# Altium PCB distance_sensor_v2.PcbDoc
Units mm, origin at the board's own origin, x right, y up, seen from the top; angles counter-clockwise.
Board outline 65 x 58 mm, 4 copper layers (Top Layer, Int1, Int2, Bottom Layer), stack 1.568 mm thick; 68 components, 29 nets, 217 pads, 157 vias.
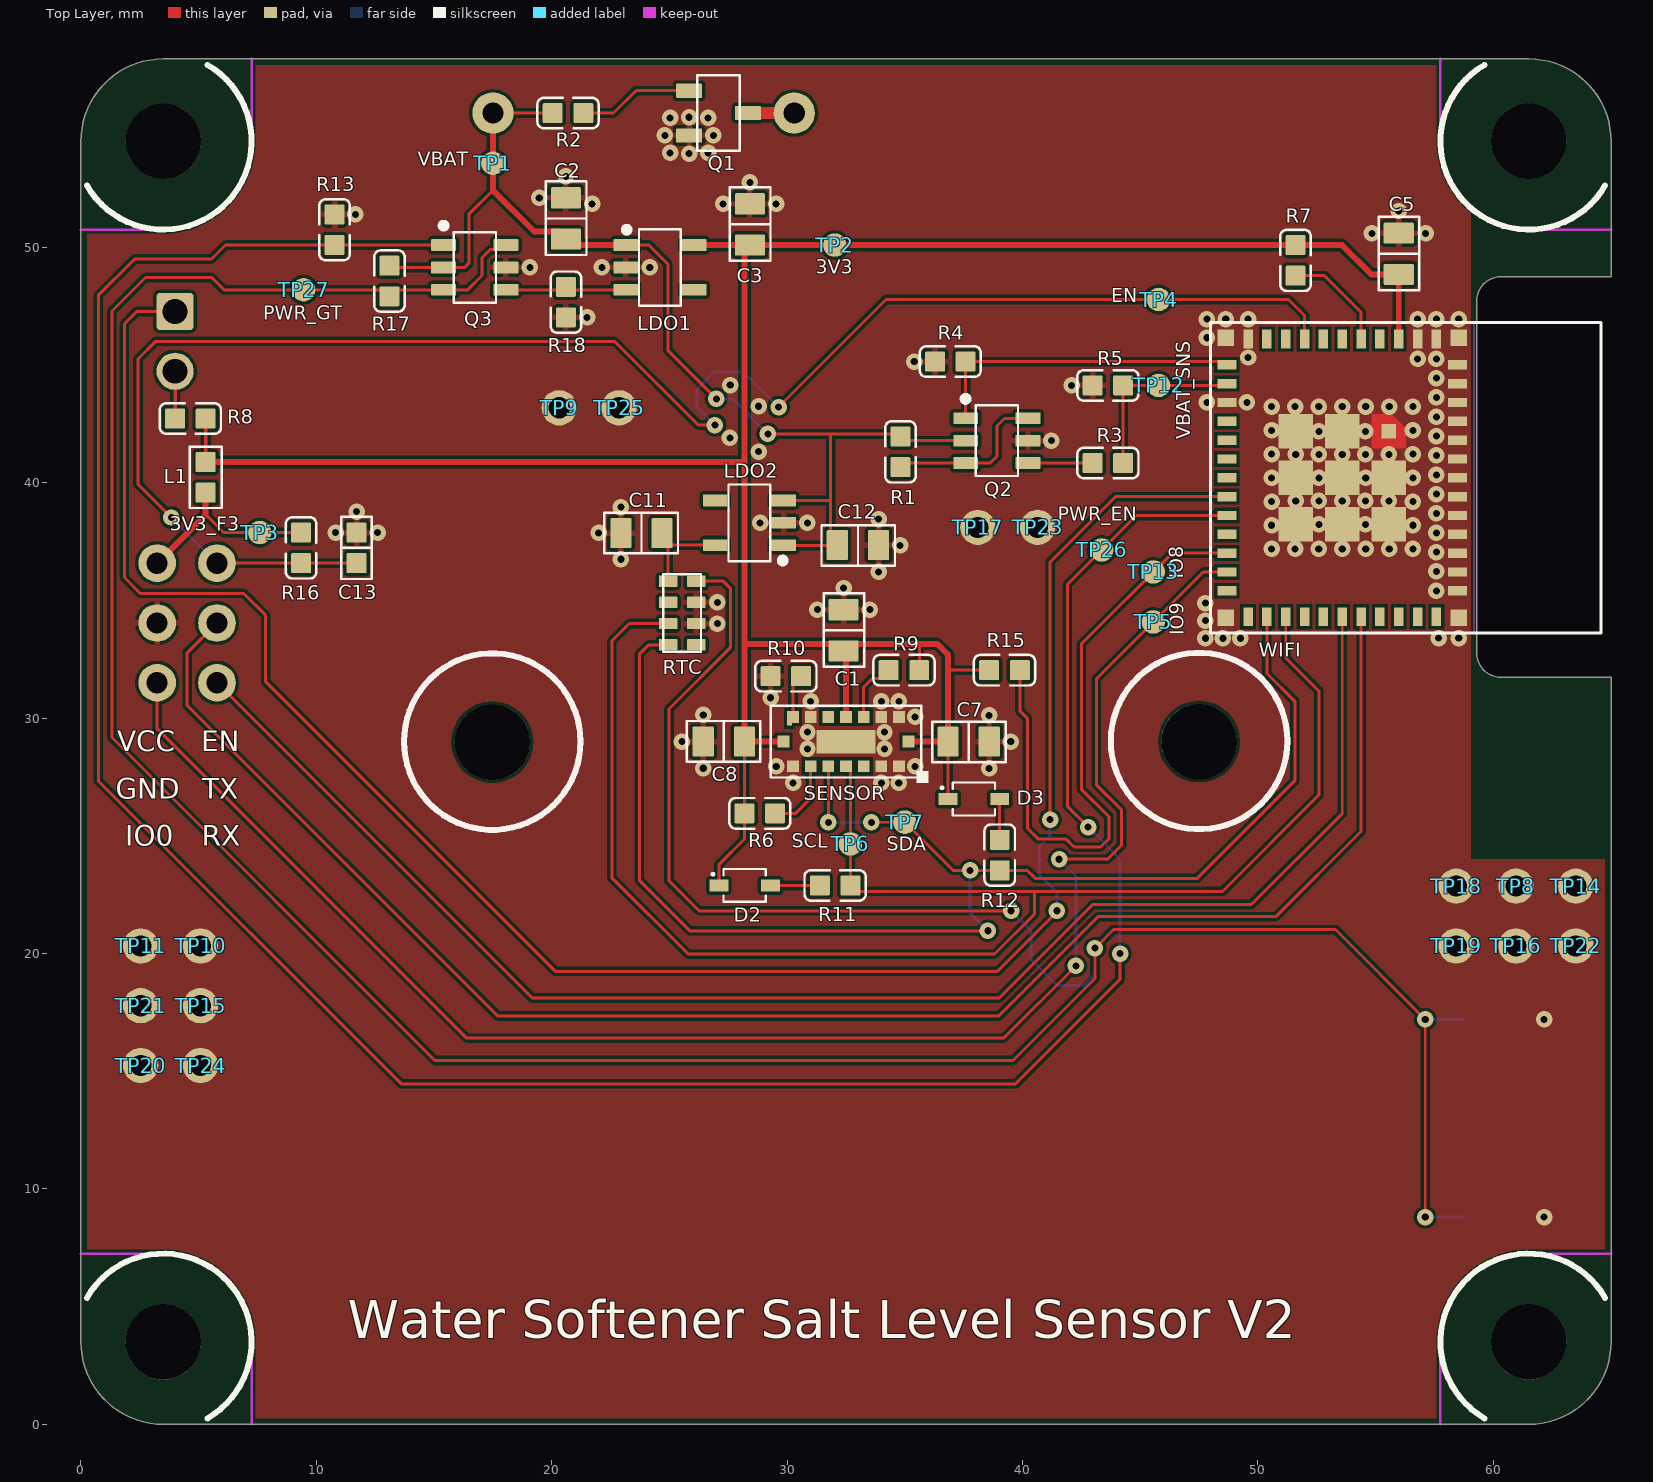
[diagram p0: Top Layer view]
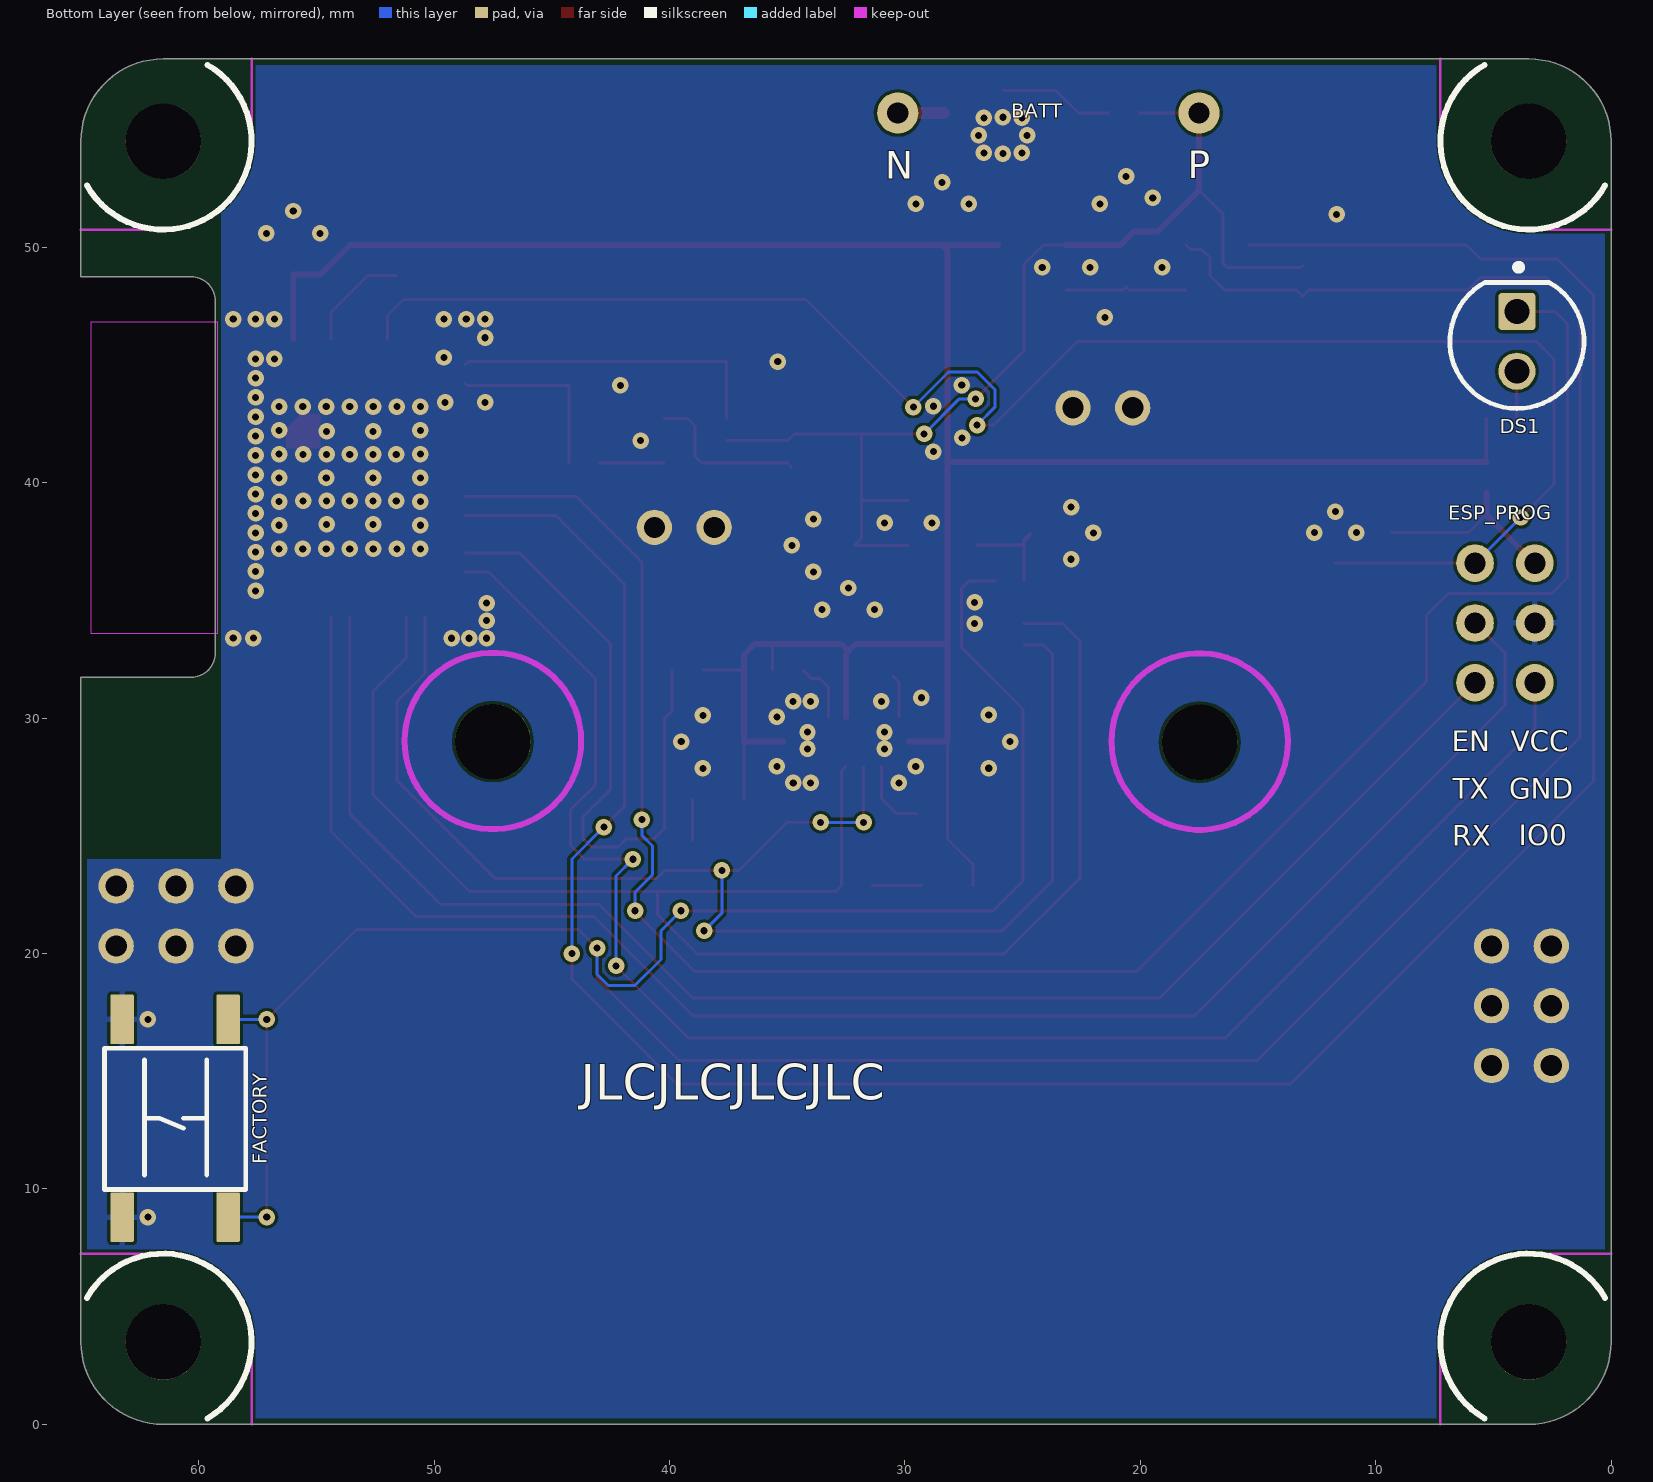
[diagram p1: Bottom Layer view, seen from below]
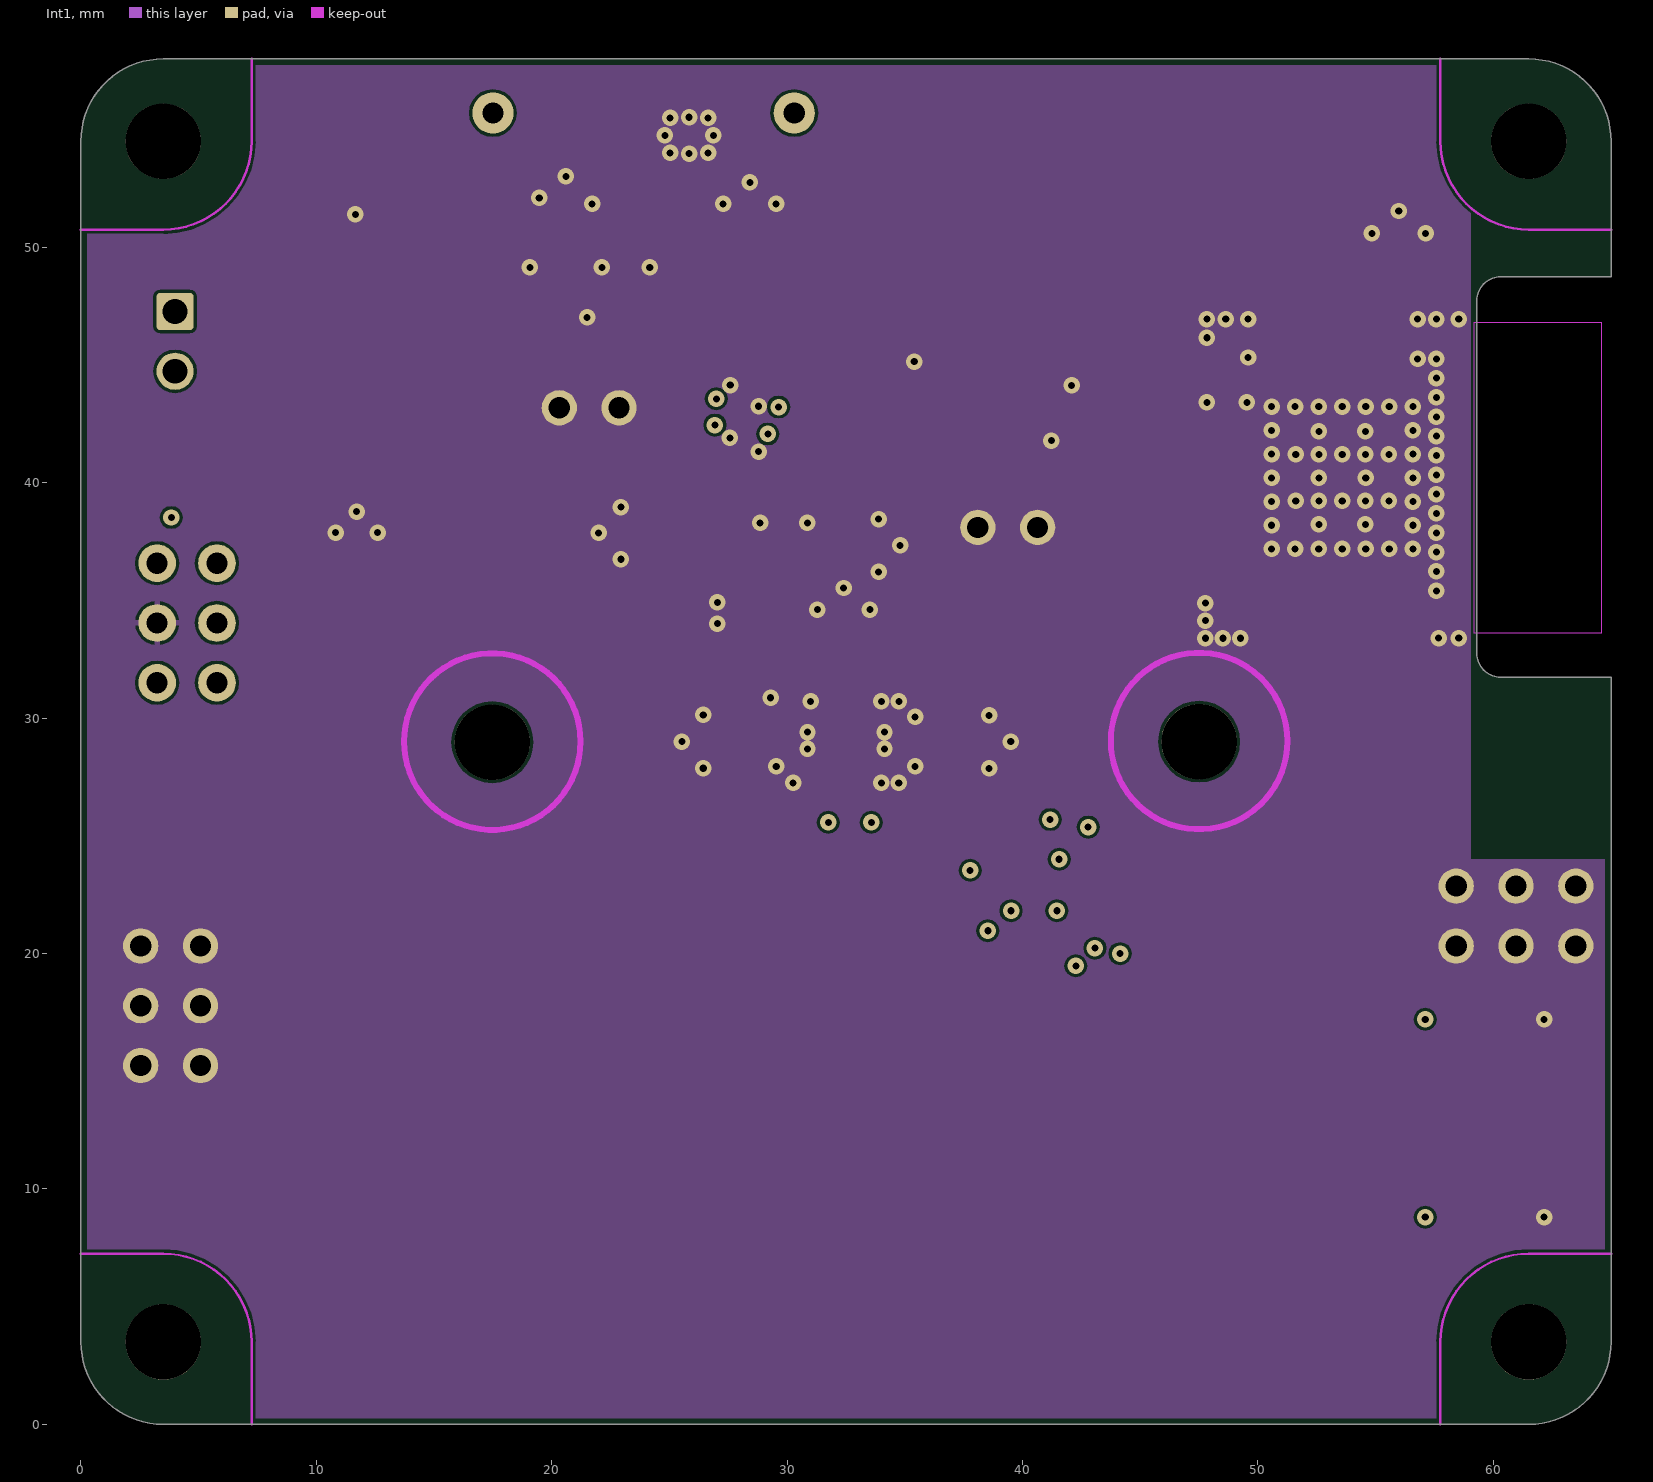
[diagram p2: Int1]
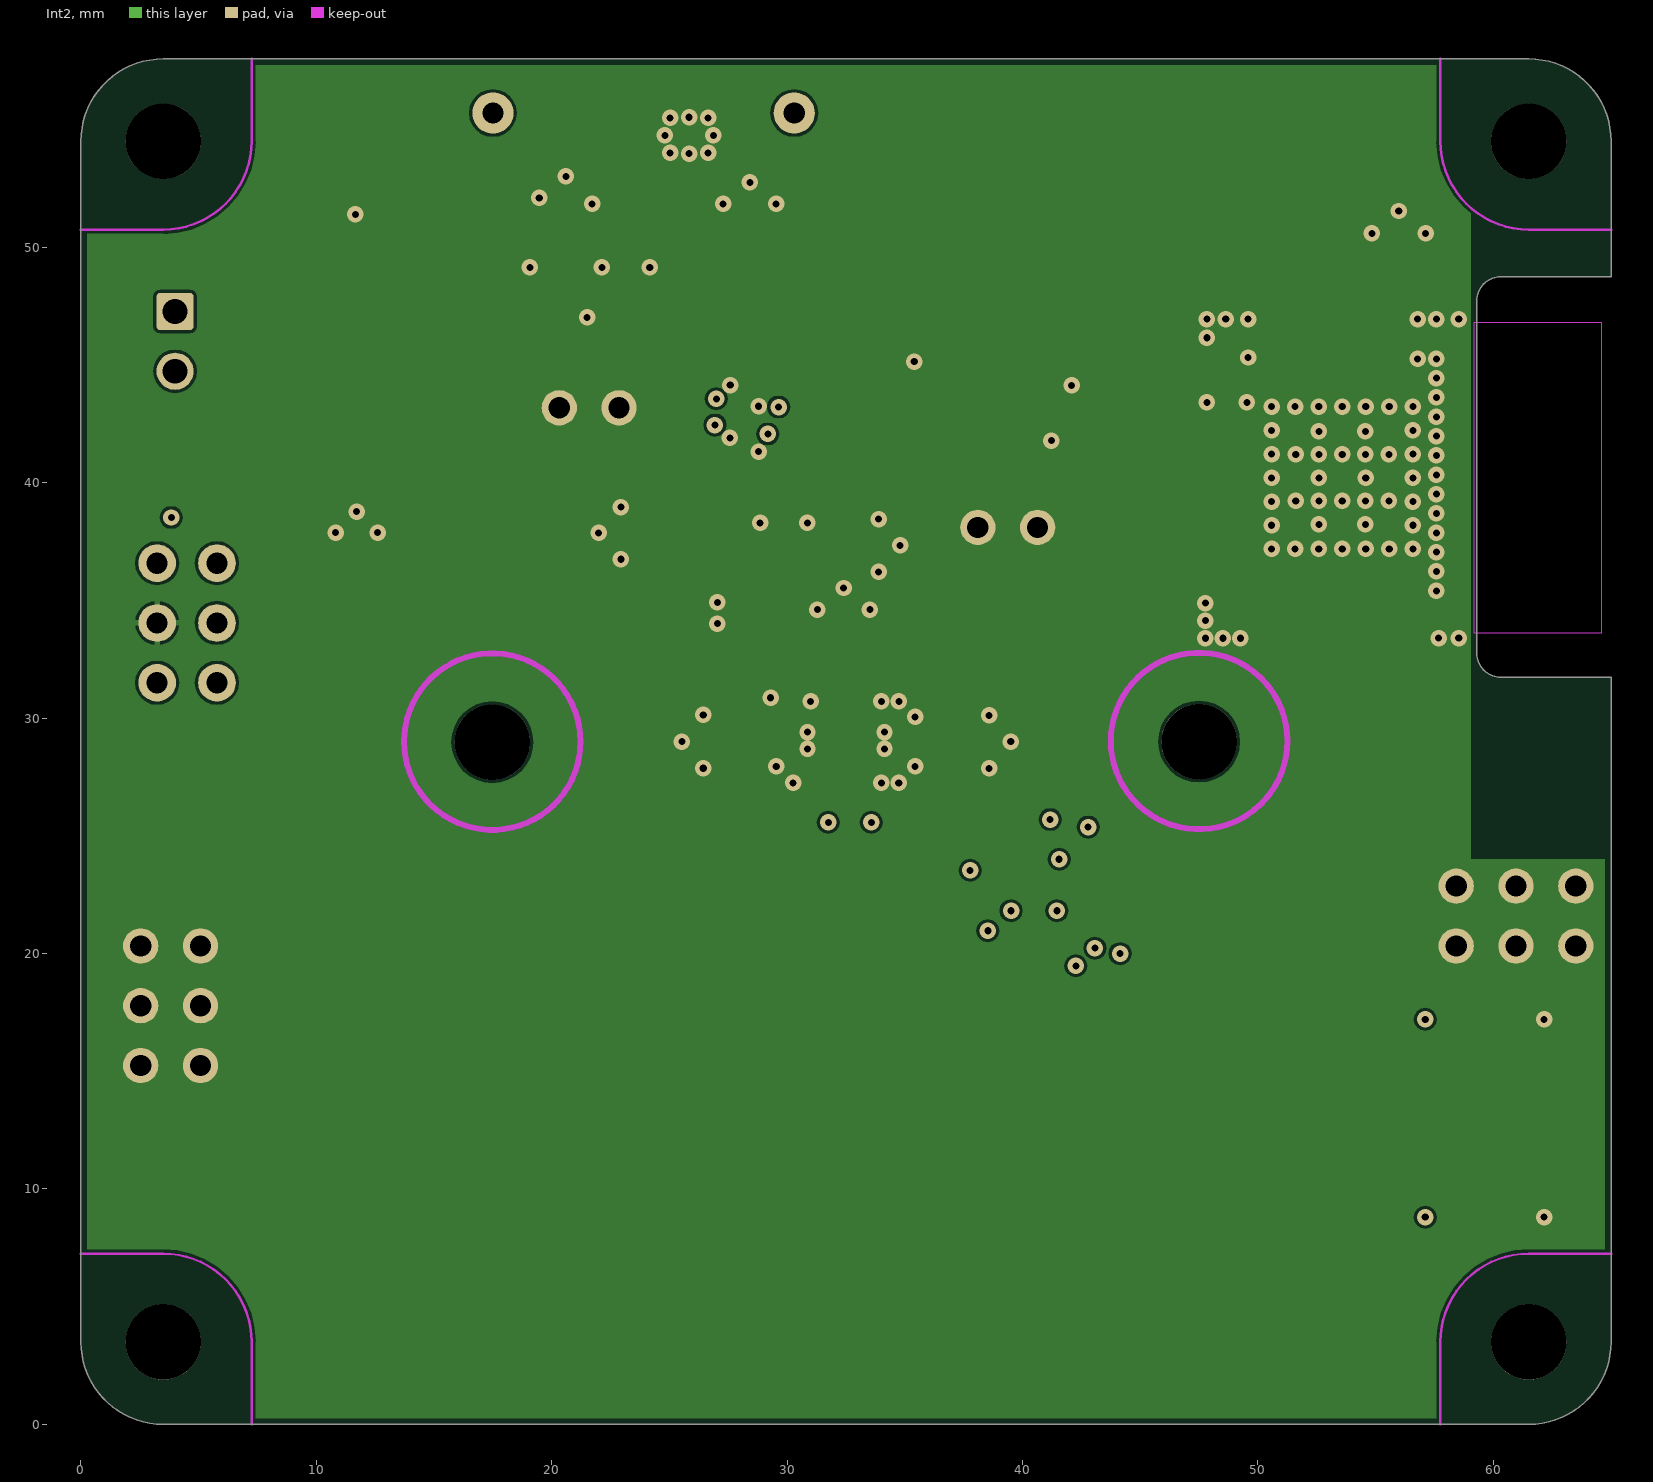
[diagram p3: Int2]
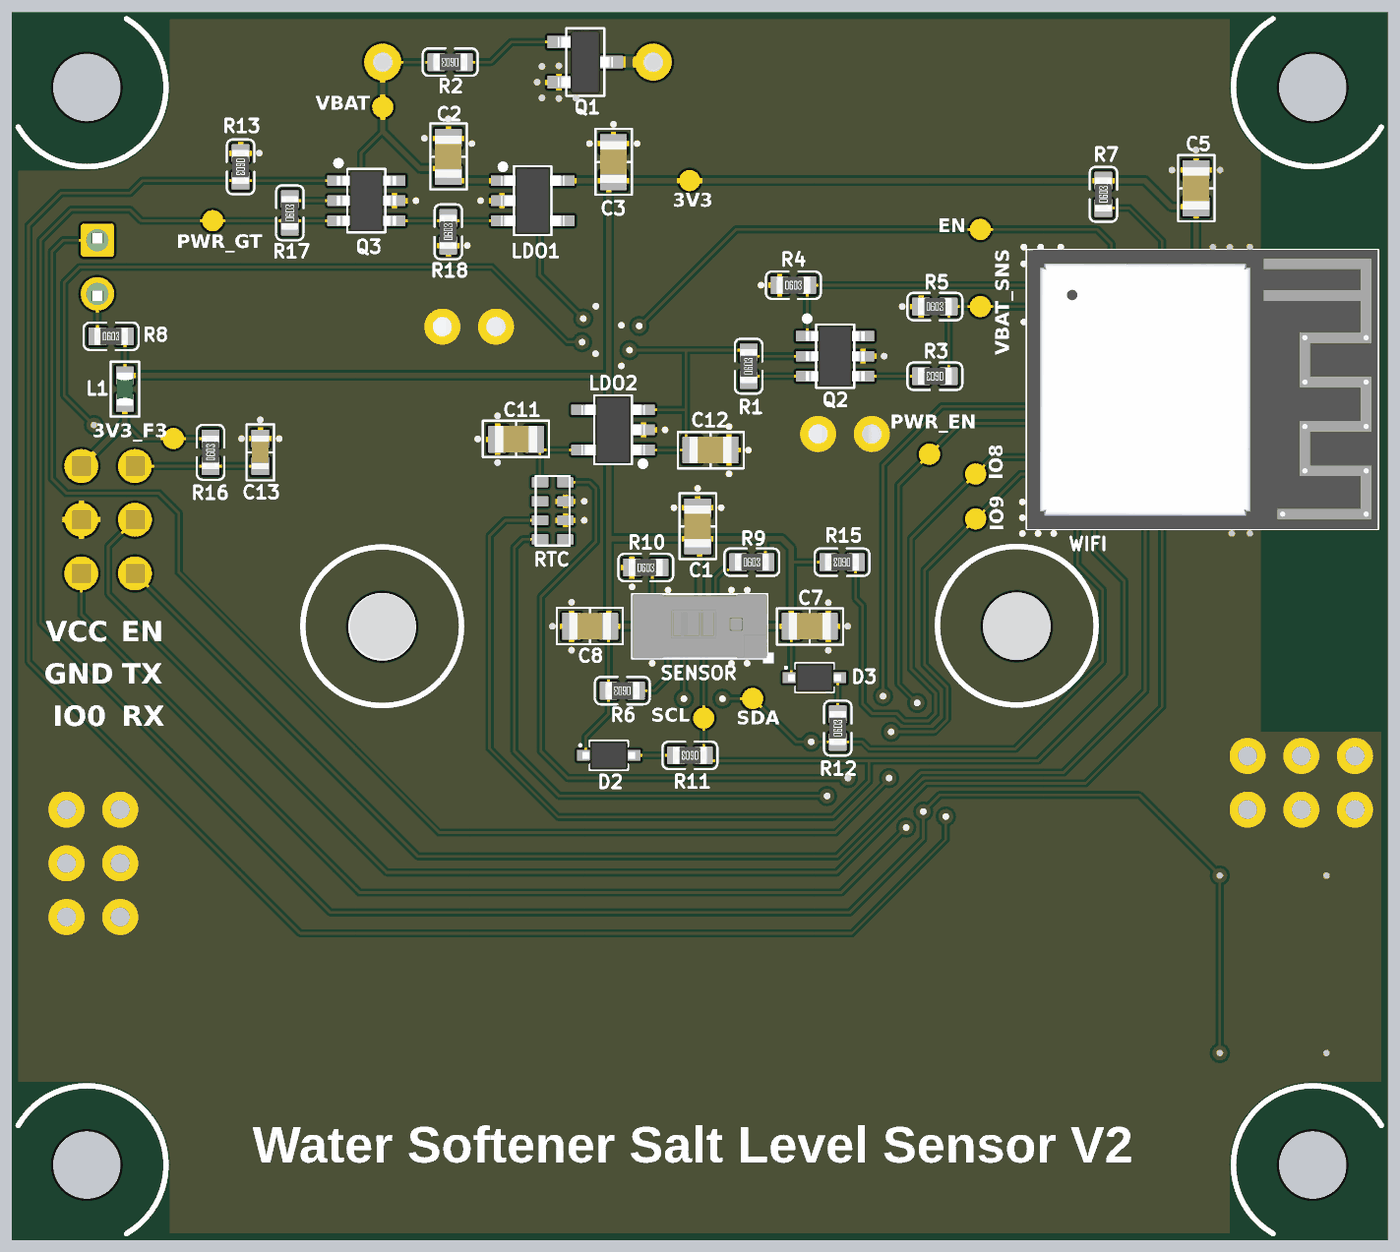
[diagram p4: 3D render of the assembled board from above, using the file's embedded part models]
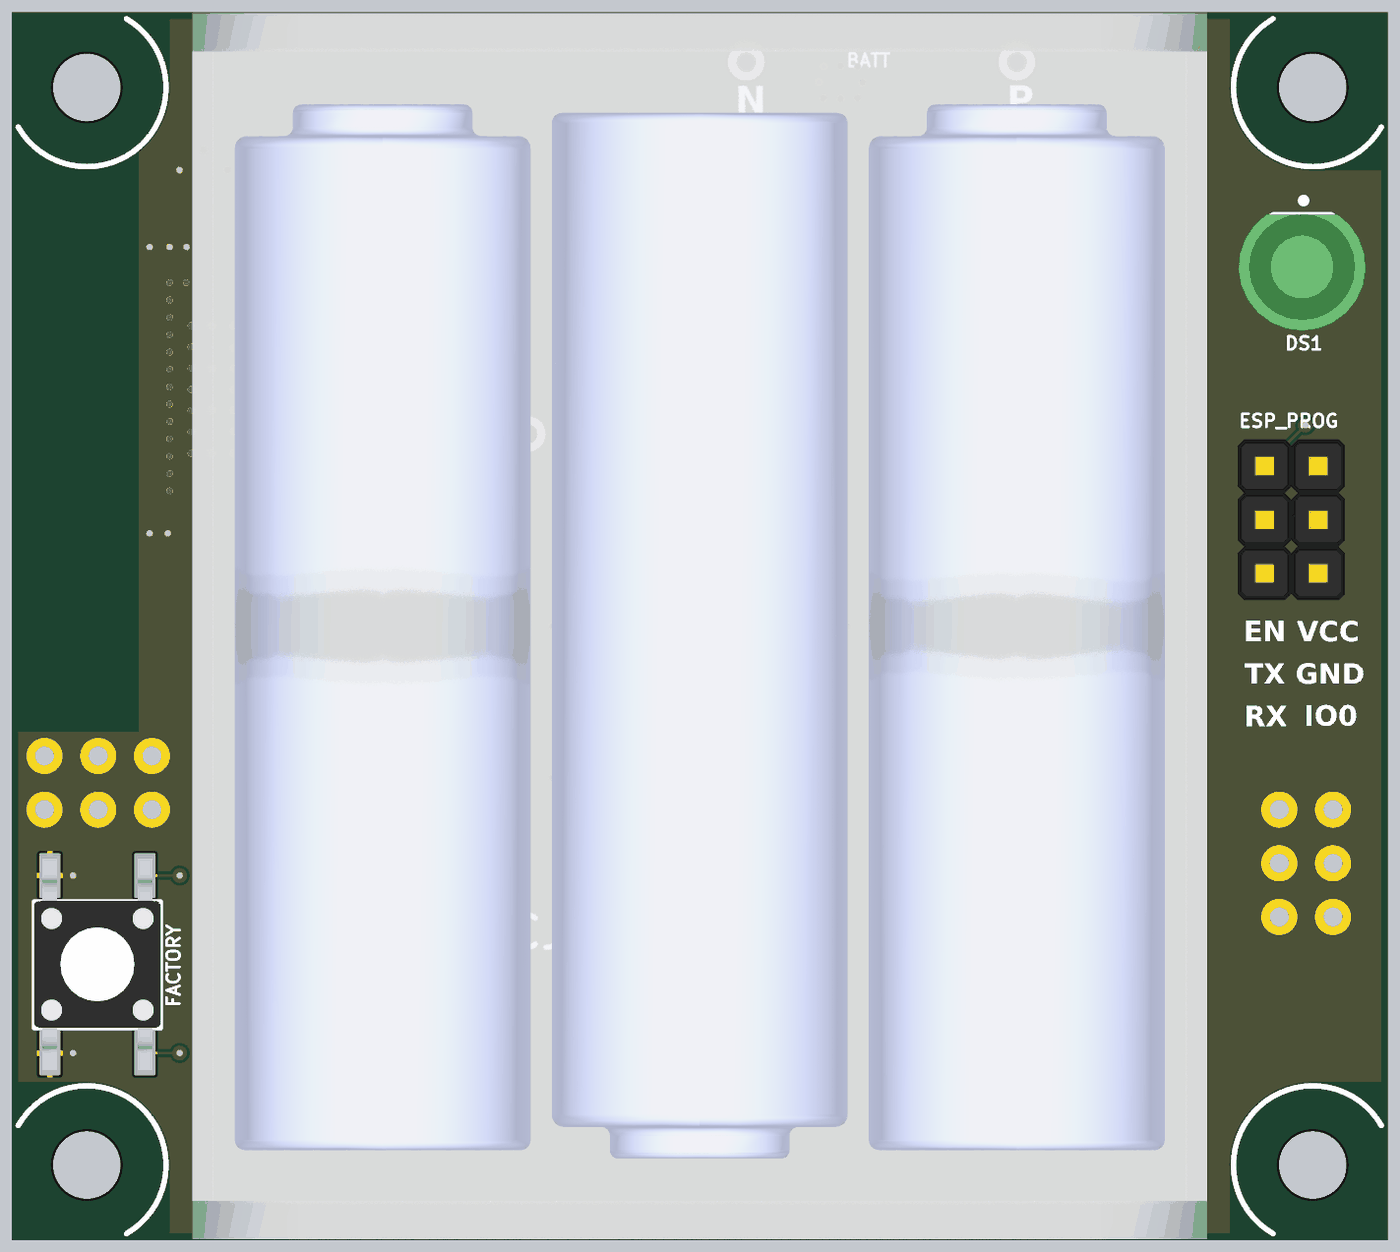
[diagram p5: 3D render of the assembled board from below, using the file's embedded part models]

## Layer stack, top to bottom
Top Solder: solder mask 0.0254, SM-001, Dk 4
Top Layer: signal copper 0.035
Dielectric 1: prepreg 0.2014, PP-017, Dk 4.3
Int1: signal copper 0.0152
Dielectric 2: core 1.065, Core-039, Dk 4.8
Int2: signal copper 0.0152
Dielectric 3: prepreg 0.2014, PP-017, Dk 4.3
Bottom Layer: signal copper 0.035
Bottom Solder: solder mask 0.0254, SM-001, Dk 4

## Board outline
0,3.5 0,54.5 cw(c3.5,54.5) 3.5,58 61.5,58 cw(c61.5,54.5) 65,54.5 65,48.74 60.3,48.74 ccw(c60.3,47.74) 59.3,47.74 59.3,32.74 ccw(c60.3,32.74) 60.3,31.74 65,31.74 65,3.5 cw(c61.5,3.5) 61.5,0 3.5,0 cw(c3.5,3.5)

## Design rules (kind name [scope] priority, off if disabled: settings)
BoardOutlineClearance [OnSignal] p1: gap=0.254 ignorepadtopadclearanceinfootprint=FALSE
Clearance [All] p1: gap=0.127 ignorepadtopadclearanceinfootprint=FALSE
ComponentClearance [All] p1: gap=0.015 collisioncheckmode=3 verticalgap=0.254 showdistances=FALSE
HoleSize [All] p1: absolutevalues=TRUE maxlimit=5 minlimit=0.3 maxpercent=80.000 minpercent=20.000
MinimumSolderMaskSliver [All] p1: minsoldermaskwidth=0.08
PolygonConnect PolygonConnect_GND [InNet('GND') vs HasFootprint('XCVR_ESP32-C3-MINI-1-N4') Or HasFootprint('VL53L5CXV0GC1') Or HasFootprint('TESTPAD')] p1: connectstyle=Direct reliefconductorwidth=0.254 reliefentries=4 polygonreliefangle="90 Angle" airgapwidth=0.254
PolygonConnect PolygonConnect_1 [All] p2: connectstyle=Relief reliefconductorwidth=0.254 reliefentries=4 polygonreliefangle="90 Angle" airgapwidth=0.127
RoutingVias [All] p1: holewidth=0.711 width=1.27 viastyle="Through Hole" minholewidth=0.711 minwidth=1.27 maxholewidth=0.711 maxwidth=1.27 useviatemplates=TRUE viatemplateguid#1={351D8F7E-A5F5-45D3-BCD8-DFDD5CF2F594} viatemplateguid#2={00A6F5BF-6FEC-49D2-999D-52EFA8FE0DC0} viatemplatename#1=GND_VIA viatemplatename#2=ROUTING_VIA
SilkToSilkClearance [All] p1: silktosilkclearance=0
SilkToSolderMaskClearance [False] p1: minsilkscreentomaskgap=0.254 clearancetoexposedcopper=TRUE
SolderMaskExpansion [All] p1: expansion=0.102 istentingtop=FALSE
Width [All] p1: maxlimit=1.27 minlimit=0.127 preferedwidth=0.127 midlayer1_maxwidth=0.254 midlayer2_maxwidth=0.254 minimp=50.000000 maximp=50.000000 favimp=50.000000
25 further rules are at their usual default settings.

## Components (designator, comment, footprint, x,y, rotation, side; value= is the part's Value field where it differs from the comment)
BATT "BATTERY" PP002055 32.5,29 r90 bottom
C1 "100nF" "CAP 0805_2012" 32.398,33.725 r270 top
C2 "4.7uF" "CAP 0805_2012" 20.602,51.223 r270 top
C3 "4.7uF" "CAP 0805_2012" 28.416,50.969 r270 top
C5 "4.7uF" "CAP 0805_2012" 55.98,49.723 r270 top
C7 "2.2uF" "CAP 0805_2012" 37.707,29 r180 top
C8 "2.2uF" "CAP 0805_2012" 27.312,29 r0 top
C11 "2.2uF" "CAP 0805_2012" 23.812,37.853 r0 top
C12 "2.2uF" "CAP 0805_2012" 33.008,37.345 r180 top
C13 "1uF" "CAP 0603_1608" 11.709,37.23 r270 top
D2 "BAT20JFILM" SODFL250X100-2L 28.198,22.89 r0 top
D3 "BAT20JFILM" SODFL250X100-2L 37.931,26.563 r0 top
DS1 "4mA" "LED 5MM THROUGH HOLE" 4,46 r0 bottom
ESP_PROG "ESP_PROG" IDC3X2 4.508,34.04 r270 bottom
FACTORY "4-1437565-1" FSM-SWITCH 61,13 r180 bottom
L1 "1.6nH" INDUCTOR_0603 5.3,40.223 r270 top
LDO1 "SPX3819M5-L-3-3" SOT23-5 24.597,49.142 r0 top
LDO2 "AP2139AK3.3" SOT23-5 28.399,38.295 r180 top
Q1 "MOSFET-N" SOT95P230X110-3L 27.086,55.7 r270 top
Q2 "MOSFET-NP" DMG6601LVT 38.906,41.783 r0 top
Q3 "MOSFET-NP" DMG6601LVT 16.731,49.142 r0 top
R1 "47K" "RES 0603_1608" 34.812,41.308 r90 top
R2 "47K" "RES 0603_1608" 20.692,55.7 r180 top
R3 "10K" "RES 0603_1608" 43.624,40.833 r180 top
R4 "47K" "RES 0603_1608" 36.931,45.142 r0 top
R5 "10K" "RES 0603_1608" 43.624,44.13 r0 top
R6 "47K" "RES 0603_1608" 28.838,25.953 r180 top
R7 "47K" "RES 0603_1608" 51.599,49.442 r90 top
R8 "47K" "RES 0603_1608" 4.65,42.723 r0 top
R9 "47K" "RES 0603_1608" 34.962,32.033 r0 top
R10 "47K" "RES 0603_1608" 29.946,31.779 r0 top
R11 "2K2" "RES 0603_1608" 32.037,22.89 r180 top
R12 "2K2" "RES 0603_1608" 39.031,24.179 r90 top
R13 "47K" "RES 0603_1608" 10.775,50.742 r270 top
R15 "47K" "RES 0603_1608" 39.233,32.033 r180 top
R16 "47K" "RES 0603_1608" 9.354,37.23 r90 top
R17 "47K" "RES 0603_1608" 13.106,48.565 r90 top
R18 "47K" "RES 0603_1608" 20.602,47.669 r90 top
RTC "RV-8263-C7" RV-8263-C7 25.542,34.464 r90 top
SENSOR "VL53L5CXV0GC" VL53L5CXV0GC1 32.5,29 r180 top
TP1 "VBAT" TESTPOINT 17.5,53.569 r0 top
TP2 "3V3" TESTPOINT 32.022,50.092 r0 top
TP3 "3V3_F3" TESTPOINT 7.595,37.88 r180 top
TP4 "EN" TESTPOINT 45.776,47.78 r0 top
TP5 "IO9" TESTPOINT 45.556,34.082 r0 top
TP6 "SCL" TESTPOINT 32.687,24.653 r0 top
TP7 "SDA" TESTPOINT 35,25.58 r0 top
TP8 "TESTPOINT" TESTPAD 60.96,22.86 r270 top
TP9 "TESTPOINT" TESTPAD 20.32,43.18 r0 top
TP10 "TESTPOINT" TESTPAD 5.08,20.32 r180 top
TP11 "TESTPOINT" TESTPAD 2.54,20.32 r180 top
TP12 "VBAT_SNS" TESTPOINT 45.776,44.13 r0 top
TP13 "IO8" TESTPOINT 45.556,36.206 r0 top
TP14 "TESTPOINT" TESTPAD 63.5,22.86 r270 top
TP15 "TESTPOINT" TESTPAD 5.08,17.78 r270 top
TP16 "TESTPOINT" TESTPAD 60.96,20.32 r90 top
TP17 "TESTPOINT" TESTPAD 38.1,38.1 r0 top
TP18 "TESTPOINT" TESTPAD 58.42,22.86 r180 top
TP19 "TESTPOINT" TESTPAD 58.42,20.32 r180 top
TP20 "TESTPOINT" TESTPAD 2.54,15.24 r270 top
TP21 "TESTPOINT" TESTPAD 2.54,17.78 r270 top
TP22 "TESTPOINT" TESTPAD 63.5,20.32 r90 top
TP23 "TESTPOINT" TESTPAD 40.64,38.1 r0 top
TP24 "TESTPOINT" TESTPAD 5.08,15.24 r270 top
TP25 "TESTPOINT" TESTPAD 22.86,43.18 r0 top
TP26 "PWR_EN" TESTPOINT 43.368,37.141 r0 top
TP27 "PWR_GT" TESTPOINT 9.456,48.192 r0 top
WIFI "ESP32-C3-MINI-1-N4" XCVR_ESP32-C3-MINI-1-N4 56.28,40.206 r270 top

## Footprints (in the part's own frame and the unit in brackets; to place one, negate y for a bottom-side part, rotate by r counter-clockwise, add the part's x,y. Pads: shape width x height; smd on the part's side, far side on the other; paste and mask are expansions set on the pad)
"CAP 0603_1608" [mm] "Chip Capacitor, 2-Leads, Body 1.60x0.80mm, IPC Medium Density"
  rrect10% 0.848x0.848 smd: 1(-0.65,0) 2(0.65,0)
  silkscreen extent -1.33,-0.65 1.33,0.65, body extent -0.8,-0.41 0.8,0.41, height 0.82
"CAP 0805_2012" [mm] "Chip Capacitor, 2-Leads, Body 2.00x1.20mm, IPC Medium Density"
  rrect10% 0.9x1.275 smd: 1(-0.876,0) 2(0.876,0)
  silkscreen extent -1.58,-0.85 1.55,0.87, body extent -1,-0.64 1,0.64, height 1.26
DMG6601LVT [mm]
  rrect10% 1.05x0.5 smd: 1(-1.325,0.95) 2(-1.325,0) 3(-1.325,-0.95) 4(1.325,-0.95) 5(1.325,0) 6(1.325,0.95)
  silkscreen extent -1.45,-1.5 0.9,1.9, body extent -1.4,-1.45 1.4,1.45, height 1
FSM-SWITCH [mm]
  rrect10% 1x2.1 smd: 1(-2.25,-4.2) 1(-2.25,4.2) 2(2.25,-4.2) 2(2.25,4.2)
  silkscreen extent -3,-3.03 3,2.97, body extent -3,-5 3,5, height 5.07
IDC3X2 [mm]
  round 1.6 hole 0.9: 1(-2.54,-1.27) 2(0,-1.27) 3(2.54,-1.27) 4(2.54,1.27) 5(0,1.27) 6(-2.54,1.27)
  body extent -3.81,-2.54 3.81,2.54, height 8
INDUCTOR_0603 [mm]
  rrect10% 0.848x0.848 smd: 1(-0.65,0) 2(0.65,0)
  silkscreen extent -1.3,-0.67 1.3,0.67, body extent -0.8,-0.4 0.8,0.4, height 0.81
"LED 5MM THROUGH HOLE" [mm] "5MM through hole LED"
  round 1.58 hole 1.05: 1(0,1.27)
  rrect20% 1.58x1.58 hole 1.05: 2(0,-1.27)
  silkscreen extent -2.85,-3.22 2.85,2.85, body extent -3,-2.5 3,3, height 13.8
PP002055 [mm] "3 x AA Battery Holder"
  round 3.2 hole 3.2 unplated: M1(-0.025,-15.025) M2(0,15)
  round 1.75 hole 0.9: VNEG(26.7,-2.2) VPOS(26.7,-15)
  body extent -29,-24 29,24, height 17
"RES 0603_1608" [mm] "Chip Resistor, 2-Leads, Body 1.60x0.80mm, IPC Medium Density"
  rrect12% 0.848x0.848 smd: 1(-0.65,0) 2(0.65,0)
  silkscreen extent -1.3,-0.65 1.3,0.65, body extent -0.8,-0.4 0.8,0.4, height 0.45
RV-8263-C7 [mm] "Real-Time Clock Module"
  rrect10% 0.48x0.78 smd mask+0.076: 1(-1.35,-0.6) 2(-0.45,-0.6) 3(0.45,-0.6) 4(1.35,-0.6) 5(1.35,0.6) 6(0.45,0.6) 7(-0.45,0.6) 8(-1.35,0.6)
  silkscreen extent -1.65,-0.8 1.65,0.8, body extent -1.6,-0.75 1.6,0.75, height 0.8
SODFL250X100-2L [mm] "SODFL, 2-Leads, Body 1.25x2.50mm, IPC High Density"
  rrect1% 0.8x0.5 smd: 1(1.1,0) 2(-1.1,0)
  silkscreen extent -1.4,-0.7 0.9,0.7, body extent -1.25,-0.67 1.25,0.67, height 1
SOT23-5 [mm] "SOT23, 5-Leads, Body 3.00x2.75mm, Pitch 0.95mm, IPC Medium Density"
  rrect10% 1.05x0.5 smd: 1(-1.45,0.95) 2(-1.45,0) 3(-1.45,-0.95) 4(1.45,-0.95) 5(1.45,0.95)
  silkscreen extent -1.54,-1.63 0.89,1.73, body extent -1.5,-1.58 1.5,1.58, height 1
SOT95P230X110-3L [mm] "SOT23, 3-Leads, Body 2.90x2.30mm, Pitch 0.95mm, IPC High Density"
  rrect10% 0.6x1.1 smd: 1(-0.95,-1.25) 2(0.95,-1.25) 3(0,1.25)
  silkscreen extent -1.6,-0.9 1.6,0.9, body extent -1.5,-1.3 1.5,1.3, height 1.1
TESTPAD [mm]
  round 1.5 hole 0.9: 1(0,0)
TESTPOINT [mm]
  round 1 smd paste-900: 1(0,0)
VL53L5CXV0GC1 [mm]
  rect 0.5x0.5 smd mask+0.076: A1(2.25,-1.05) A3(0.75,-1.05) A4(0,-1.05) A5(-0.75,-1.05) B1(2.65,0) B7(-2.65,0) C2(1.5,1.05) C3(0.75,1.05) C4(0,1.05) C5(-0.75,1.05)
  rect 0.2x0.15 smd mask+0.076: A1(2.4,-0.75)
  rect 0.5x0.5 smd mask+0: A2(1.5,-1.05) A6(-1.5,-1.05) A7(-2.25,-1.05) C1(2.25,1.05) C6(-1.5,1.05) C7(-2.25,1.05)
  rect 2.5x1 smd mask+0: B4(0,0)
  silkscreen extent -3.5,-1.53 3.2,1.75, body extent -3.21,-1.51 3.19,1.52, height 1.53
XCVR_ESP32-C3-MINI-1-N4 [mm]
  rect 0.8x0.4 smd: 3(-5.9,-0.3) 4(-5.9,-1.1) 5(-5.9,-1.9) 6(-5.9,-2.7) 7(-5.9,-3.5) 8(-5.9,-4.3) 9(-5.9,-5.1) 10(-5.9,-5.9) 25(5.9,-6.7) 26(5.9,-5.9) 27(5.9,-5.1) 28(5.9,-4.3) 29(5.9,-3.5) 30(5.9,-2.7) 31(5.9,-1.9) 32(5.9,-1.1) 33(5.9,-0.3) 34(5.9,0.5) 35(5.9,1.3)
  rect 0.4x0.8 smd: 12(-4.8,-7.6) 13(-4,-7.6) 15(-2.4,-7.6) 16(-1.6,-7.6) 17(-0.8,-7.6) 18(0,-7.6) 19(0.8,-7.6) 20(1.6,-7.6) 21(2.4,-7.6) 22(3.2,-7.6) 23(4,-7.6) 24(4.8,-7.6)
  rect 0.7x0.7 smd mask+0.05: GX(-5.95,2.25) GX(-5.95,-7.65) GX(5.95,2.25) GX(5.95,-7.65)
  rect 0.8x0.4 smd mask+0.05: GX(-5.9,0.5) GX(-5.9,1.3) GX(-5.9,-6.7)
  rect 0.4x0.8 smd mask+0.05: GX(-4.8,2.2) GX(-4,2.2) GX(-3.2,2.2) GX(-3.2,-7.6) GX(-2.4,2.2) GX(-1.6,2.2) GX(-0.8,2.2) GX(0,2.2) GX(0.8,2.2) GX(1.6,2.2) GX(2.4,2.2) GX(3.2,2.2) GX(4,2.2) GX(4.8,2.2)
  rect 0.6x0.6 smd paste-1 mask+0: GX(-1.975,-0.725)
  rect 1.45x1.45 smd mask+0: GX(-1.975,-2.7) GX(-1.975,-4.675) GX(0,-0.725) GX(0,-2.7) GX(0,-4.675) GX(1.975,-0.725) GX(1.975,-2.7) GX(1.975,-4.675)
  Top Layer region: -1.25,-1.45 -2.7,-1.45 -2.7,-0.6 -2.1,0 -1.25,0
  Keep-Out Layer region: 6.6,2.9 -6.6,2.9 -6.6,8.3 6.6,8.3
  Keep-Out Layer region: 6.6,2.9 -6.6,2.9 -6.6,8.3 6.6,8.3
  silkscreen extent -6.6,-8.3 6.6,8.3, body extent -6.6,-8.3 6.6,8.3, height 2.55

## Part data
C1 C2 C3 C5 C7 C8 C11 C12 C13: library part CAP_CERAMIC, "MLCC"
D2 D3: "Schottky Diode 20v 500mA"
DS1: library part LED, "LED"
FACTORY: library part BUTTON, "6x6mm tactile switch SPST_NO", Manufacturer_Name="TE Connectivity", RS Part Number=1616046, Allied_Number=R1117787, Datasheet Link=http://uk.rs-online.com/web/p/products/1616046, Manufacturer_Part_Number=4-1437565-1
L1: library part INDUCTOR, "Inductor", MPN=744313330, RefDes=RefDes, TYPE=TYPE, Vendor="Wurth Elektronik"
LDO1 LDO2: library part LDO_SOT23-5
  LDO1: MPN=SPX3819M5-L-3-3
  LDO2: MPN=AP2139AK3.3
Q1: "N Channel MOSFET. 300mA"
Q2 Q3: "N/P Channel MOSFET", LCSC Part Number=C500791, Manufacturer Part Number=DMC2400UV-13
R1 R2 R3 R4 R5 R6 R7 R8 R9 R10 R11 R12 R13 R15 R16 R17 R18: library part RESISTOR, "Resistor"
RTC: "Real-Time Clock Module", MPN=RV-8263-C7
SENSOR: "TOF distance sensor", Arrow Part Number=VL53L5CXV0GC/1, Manufacturer_Name=STMicroelectronics, Mouser Part Number=511-VL53L5CXV0GC/1, Arrow Price/Stock=https://www.arrow.com/en/products/vl53l5cxv0gc1/stmicroelectronics?region=nac, Datasheet Link=https://www.arrow.com/en/products/vl53l5cxv0gc1/stmicroelectronics?region=nac, Geometry.Height=1.55mm, Manufacturer_Part_Number=VL53L5CXV0GC/1, Mouser Price/Stock=https://www.mouser.co.uk/ProductDetail/STMicroelectronics/VL53L5CXV0GC-1?qs=QNEnbhJQKvZPmRJw6ASPyw%3D%3D, MPN=VL53L5CXV0GC
TP1 TP2 TP3 TP4 TP5 TP6 TP7 TP12 TP13 TP26 TP27: library part TESTPOINT
  TP1 TP2 TP3 TP6 TP7 TP12: TestID=???
  TP4 TP5 TP13 TP26 TP27: TestID=IO9
WIFI: "Wifi module ESP32-C3", Package="SMD-53 Espressif Systems", Availability="In Stock", Check_prices=https://www.snapeda.com/parts/ESP32-C3-MINI-1-N4/Espressif+Systems/view-part/?ref=eda, MF="Espressif Systems", MPN=ESP32-C3-MINI-1-N4, Price=None, Purchase-URL=https://pricing.snapeda.com/search/part/ESP32-C3-MINI-1-N4/?ref=eda, SnapEDA_Link=https://www.snapeda.com/parts/ESP32-C3-MINI-1-N4/Espressif+Systems/view-part/?ref=snap
TP8 TP9 TP10 TP11 TP14 TP15 TP16 TP17 TP18 TP19 TP20 TP21 TP22 TP23 TP24 TP25: TestID=???

## Free pads (board coordinates)
  round 3.2 hole 3.2 unplated: MT1(61.5,54.5) MT2(61.5,3.5) MT3(3.5,3.5) MT4(3.5,54.5)

## Via types
v1: diameter 0.7, hole 0.3, Top Layer to Bottom Layer, tented both sides, 157 vias

## Nets (pads, with @x,y where several pads share a name; then routed paths per layer and width w, separated by ;. In a path a pad name is that pad's centre, name@x,y a point inside that pad or via, vN(x,y) a via of type N, cw(c..) or ccw(c..) an arc to the next point about the centre after c; other vN are vias at no path point)
3V3: C1.2 C3.2 C5.2 C7.2 C8.2 D2.2 D3.2 L1.1 LDO1.5 R6.2 R7.2 R8.2 R9.2 R15.2 SENSOR.A4 SENSOR.B1 SENSOR.B7 TP2.1 WIFI.3 | length 109.9
  Top Layer w0.127: D2.2 27.098,23.771 28.188,24.861 R6.2 C8.2 ; R9.2 35.612,33.153 ; D3.2 C7.2 ; 36.831,32.033 R15.2
  Top Layer w0.152: L1.1 R8.2
  Top Layer w0.254: L1.1 28.188,40.873 ; LDO1.5 C3.2 ; SENSOR.B1 C8.2 28.188,33.153 ; SENSOR.A4 32.5,32.747 C1.2 ; SENSOR.B7 C7.2 36.831,32.033 36.831,32.694 36.371,33.153 35.612,33.153 32.703,33.153 C1.2 ; WIFI.3 C5.2 54.816,48.847 53.57,50.092 R7.2 C3.2 ; 28.188,33.153 28.188,40.873 ; 28.188,33.153 32.094,33.153 C1.2 ; 28.188,40.873 28.188,49.864 C3.2
3V3_F3: ESP_PROG.6 L1.2 R16.2 TP3.1 | length 8.2
  Top Layer w0.127: 5.3,38.642 6.062,37.88 R16.2
  Top Layer w0.254: ESP_PROG.6 5.3,38.642 L1.2
3V3_RTC: C11.2 LDO2.5 RTC.5 | length 4.7
  Top Layer w0.127: RTC.5 C11.2@24.942,37.477 ; LDO2.5 25.075,37.345 C11.2@24.942,37.477 ; C11.2@24.942,37.477 24.688,37.731 C11.2 24.942,37.599 C11.2@24.942,37.477
\PWR_EN: Q3.1 R13.2 TP26.1 WIFI.20 | length 112.3
  Top Layer w0.127: Q3.1 R13.2 6.144,50.092 5.552,49.5 2.282,49.5 0.742,47.961 0.742,27.332 13.61,14.464 39.704,14.464 44.142,18.902 v1(44.142,19.995) ; v1(42.788,25.37) 41.902,26.255 41.902,35.675 44.833,38.606 WIFI.20
  Bottom Layer w0.127: v1(42.788,25.37) 44.142,24.016 v1@44.142,20.122
\PWR_GATE: FACTORY.2 Q3.3 Q3.6 R17.1 RTC.4 TP27.1 | length 151.9
  Top Layer w0.127: Q3.6 17.87,49.906 17.388,49.906 17.041,49.559 17.041,48.797 16.436,48.192 Q3.3 13.384,48.192 R17.1 12.829,48.192 6.083,48.192 5.558,48.717 2.747,48.717 1.316,47.287 1.316,29.173 15.036,15.453 39.596,15.453 43.076,18.933 v1(43.076,20.228) ; RTC.4 27.281,35.814 27.586,35.509 27.586,32.991 24.984,30.389 24.984,23.085 26.255,21.815 v1(39.51,21.815) ; v1@43.127,20.279 43.863,21.015 53.291,21.015 v1(57.106,17.2) v1(57.106,8.8)
  Bottom Layer w0.127: v1(39.51,21.815) 40.361,20.964 40.361,19.748 41.47,18.639 42.594,18.639 43.076,19.121 v1(43.076,20.228) ; v1(57.106,8.8) FACTORY.2@58.75,8.8 ; v1(57.106,17.2) FACTORY.2@58.75,17.2
ESP_EN: C13.2 ESP_PROG.1 R16.1 TP4.1 WIFI.8 | length 74
  Top Layer w0.127: v1(3.839,38.519) 2.427,39.932 2.427,45.256 3.175,46.005 22.662,46.005 26.22,42.446 v1(26.934,42.446) ; ESP_PROG.1 R16.1 C13.2 ; v1(29.635,43.212) 34.203,47.78 51.302,47.78 51.98,47.102 WIFI.8
  Bottom Layer w0.127: v1(3.839,38.519) ESP_PROG.1 ; v1(26.934,42.446) 26.181,43.2 26.181,43.961 26.923,44.704 28.143,44.704 v1(29.635,43.212)
ESP_LED: DS1.2 WIFI.19 | length 86.5
  Top Layer w0.127: DS1.2 2.369,47.27 1.848,46.749 1.848,35.972 2.523,35.296 6.918,35.296 7.849,34.366 7.849,31.545 20.154,19.24 38.935,19.24 v1@41.51,21.815 ; v1@41.173,25.588 41.173,36.628 43.952,39.406 WIFI.19
  Bottom Layer w0.127: v1(41.173,25.69) 41.173,25.02 40.716,24.563 40.716,23.346 41.459,22.603 v1(41.459,21.815)
ESP_RX: ESP_PROG.3 WIFI.30 | length 65
  Top Layer w0.127: ESP_PROG.3 19.169,18.109 39.013,18.109 42.981,22.078 49.717,22.078 53.58,25.941 WIFI.30
ESP_TX: ESP_PROG.2 WIFI.31 | length 71.7
  Top Layer w0.127: ESP_PROG.2 4.514,32.776 4.514,30.537 17.705,17.346 38.993,17.346 43.209,21.562 50.757,21.562 54.38,25.185 WIFI.31
GND: C1.1 C2.1 C3.1 C5.1 C7.1 C8.1 C11.1 C12.1 C13.1 ESP_PROG.5 FACTORY.1 LDO1.2 LDO2.2 Q1.2 Q2.5 Q3.5 R4.1 R5.1 R10.1 R13.1 R18.1 RTC.2 RTC.3 SENSOR.A2 SENSOR.A6 SENSOR.A7 SENSOR.B4 SENSOR.C1 SENSOR.C6 SENSOR.C7 TP8.1 TP9.1 TP10.1 TP11.1 TP14.1 TP15.1 TP16.1 TP17.1 TP18.1 TP19.1 TP20.1 TP21.1 TP22.1 TP23.1 TP24.1 TP25.1 WIFI.GX
  other v1: 62.154,8.8 62.154,17.2 30.25,27.248 34,27.248 34.74,27.248 26.436,27.867 38.583,27.86 29.538,27.95 35.439,27.95 30.864,28.692 34.136,28.692 25.525,28.999 39.498,29 30.864,29.403 34.136,29.403 35.439,30.05 26.436,30.132 38.583,30.115 31,30.713 34,30.713 34.75,30.713 29.298,30.862 47.765,33.391 48.507,33.391 49.25,33.391 57.67,33.396 58.53,33.396 27.036,34.014 47.765,34.138 31.281,34.611 33.516,34.611 47.765,34.884 27.036,34.914 57.58,35.406 32.398,35.525 33.884,36.213 57.58,36.227 22.936,36.746 57.58,37.048 50.583,37.184 51.582,37.184 52.581,37.184 53.58,37.184 54.579,37.184 55.578,37.184 56.577,37.184 34.8,37.332 10.819,37.88 12.6,37.88 21.994,37.866 57.58,37.869 50.583,38.191 56.577,38.191 52.592,38.231 54.567,38.231 28.855,38.295 30.861,38.295 33.884,38.451 57.58,38.691 11.709,38.769 22.936,38.959 50.583,39.199 56.577,39.199 51.605,39.23 52.592,39.23 53.58,39.23 54.567,39.23 55.563,39.23 57.58,39.512 50.583,40.206 52.592,40.206 54.579,40.206 56.577,40.206 57.58,40.333 57.58,41.154 51.605,41.205 52.592,41.205 53.58,41.205 54.567,41.205 55.563,41.205 50.583,41.213 56.577,41.213 28.792,41.322 41.222,41.783 27.57,41.899 57.58,41.975 52.592,42.181 54.567,42.181 50.583,42.221 56.577,42.221 57.58,42.796 50.583,43.228 51.582,43.228 52.581,43.228 53.58,43.228 54.579,43.228 55.578,43.228 56.577,43.228 28.792,43.244 47.831,43.406 49.529,43.406 57.58,43.618 42.08,44.13 27.584,44.146 57.58,44.439 35.4,45.142 56.78,45.26 57.58,45.26 49.58,45.316 47.832,46.156 47.832,46.947 48.63,46.947 49.58,46.947 56.78,46.947 57.58,46.947 58.53,46.947 21.499,47.019 19.072,49.142 22.132,49.142 24.163,49.142 54.843,50.59 57.117,50.59 11.659,51.392 55.98,51.54 21.719,51.845 27.284,51.845 29.534,51.845 19.469,52.099 28.416,52.759 20.602,53.013 25.836,53.978 25.033,54.004 26.639,54.004 24.804,54.75 26.867,54.75 25.033,55.496 26.639,55.496 25.836,55.522
IO2: R7.1 WIFI.5 | length 4.6
  Top Layer w0.127: R7.1 52.83,48.792 54.38,47.242 WIFI.5
IO8: R15.1 TP13.1 WIFI.22 | length 27.3
  Top Layer w0.127: R15.1 39.883,30.307 40.202,29.989 40.202,25.33 40.66,24.872 41.834,24.872 42.187,24.519 43.315,24.519 43.663,24.867 43.663,25.814 42.496,26.98 42.496,33.146 46.356,37.006 WIFI.22
IO9: ESP_PROG.4 TP5.1 WIFI.23 | length 70.4
  Top Layer w0.127: ESP_PROG.4 3.238,29.551 16.389,16.4 39.193,16.4 v1(42.266,19.472) ; v1(41.554,24.003) 43.612,24.003 44.203,24.594 44.203,26.102 43.134,27.172 43.134,31.66 TP5.1 47.68,36.206 WIFI.23
  Bottom Layer w0.127: v1(41.554,24.003) 42.266,23.292 v1(42.266,19.472)
LDO_EN: LDO1.3 Q3.4 R18.2 | length 5.2
  Top Layer w0.127: Q3.4 20.475,48.192 R18.2 20.729,48.192 LDO1.3
NetD2_1: D2.1 R11.2 | length 2.1
  Top Layer w0.127: D2.1 R11.2
NetD3_1: D3.1 R12.2 | length 1.7
  Top Layer w0.127: R12.2 D3.1
NetDS1_1: DS1.1 R8.1 | length 2
  Top Layer w0.152: R8.1 DS1.1
NetQ2_D1: Q2.3 Q2.6 R1.1 | length 7
  Top Layer w0.127: R1.1 34.987,40.833 Q2.3 38.629,40.833 38.913,41.117 38.913,42.408 39.233,42.728 Q2.6@40.231,42.728
NetQ2_D2: Q2.4 R3.2 | length 2.7
  Top Layer w0.127: Q2.4 R3.2
NetR6_1: R6.1 SENSOR.C2 | length 3.1
  Top Layer w0.127: R6.1 30.365,25.953 31,26.589 SENSOR.C2
NetR9_1: R9.1 SENSOR.A5 | length 2.6
  Top Layer w0.127: SENSOR.A5 33.25,31.316 33.607,31.672 33.951,31.672 R9.1
NetR10_2: R10.2 SENSOR.A1 | length 1.8
  Top Layer w0.127: SENSOR.A1@30.25,30.05 30.25,31.535 R10.2@30.494,31.779
RPPGATE: Q1.1 R2.1 | length 4.9
  Top Layer w0.127: R2.1 22.627,55.7 23.577,56.65 Q1.1
SCL: R11.1 RTC.7 SENSOR.C4 TP6.1 WIFI.27 | length 68.7
  Top Layer w0.127: RTC.7 23.295,34.014 22.555,33.273 22.555,23.214 25.794,19.974 38.809,19.974 40.505,21.671 40.505,22.636 ; SENSOR.C4 32.687,27.764 TP6.1 R11.1 32.941,22.636 40.505,22.636 ; WIFI.27 51.18,32.553 52.585,31.148 52.585,26.727 48.494,22.636 40.505,22.636
SDA: R12.1 RTC.8 SENSOR.C3 TP7.1 WIFI.26 | length 61.9
  Top Layer w0.127: RTC.8 24.118,33.114 23.72,32.716 23.72,23.109 25.864,20.964 v1(38.523,20.964) ; v1(31.75,25.569) SENSOR.C3 ; v1(33.575,25.569) 33.581,25.574 34.994,25.574 TP7.1 37.051,23.529 v1(37.772,23.529) R12.1 40.202,23.529 40.54,23.191 47.418,23.191 51.568,27.34 51.568,30.71 50.38,31.897 WIFI.26
  Bottom Layer w0.127: v1(31.75,25.569) v1(33.575,25.569) ; v1(37.772,23.529) 37.761,23.518 37.761,21.726 v1(38.523,20.964)
VBAT: BATT.VPOS C2.2 C12.2 LDO1.1 LDO2.1 LDO2.3 Q2.2 Q3.2 R1.2 R2.2 R17.2 TP1.1 | length 48.6
  Top Layer w0.127: R17.2 13.179,49.142 Q3.2 16.306,49.142 16.48,49.316 16.48,51.402 17.5,52.422 ; BATT.VPOS R2.2 ; LDO1.1 24.126,50.092 24.929,49.289 24.929,45.622 v1(26.99,43.561) ; v1(29.178,42.069) 31.85,42.069 ; LDO2.1 29.861,37.332 32.119,37.332 C12.2 31.85,37.626 31.85,39.245 ; LDO2.3 31.85,39.245 ; Q2.2 34.987,41.783 R1.2 34.701,42.069 31.85,42.069 ; 31.85,39.245 31.85,42.069
  Top Layer w0.254: BATT.VPOS TP1.1 17.5,52.422 19.254,50.668 20.28,50.668 C2.2 20.856,50.092 LDO1.1
  Bottom Layer w0.127: v1(26.99,43.561) 27.686,43.561 v1(29.178,42.069)
VBGND: BATT.VNEG Q1.3 | length 2
  Top Layer w0.508: Q1.3 BATT.VNEG
VBSNS: R3.1 R5.2 TP12.1 WIFI.13 | length 7.7
  Top Layer w0.127: R3.1 R5.2 44.528,44.13 TP12.1 48.604,44.13 WIFI.13
VBSNS_EN: Q2.1 R4.2 WIFI.12 | length 13.6
  Top Layer w0.127: Q2.1 R4.2 48.544,45.142 WIFI.12
pads on no net: BATT.M1 BATT.M2 LDO1.4 LDO2.4 RTC.1 RTC.6 SENSOR.A3 SENSOR.C5 WIFI.4 WIFI.6 WIFI.7 WIFI.9 WIFI.10 WIFI.15 WIFI.16 WIFI.17 WIFI.18 WIFI.21 WIFI.24 WIFI.25 WIFI.28 WIFI.29 WIFI.32 WIFI.33 WIFI.34 WIFI.35

## Polygon pours and split planes (outlines as drawn)
GND on Bottom Layer "GND_L04_P003" (solid, remove dead copper, pour order 3): 0,58 0,0 65,0 65,24 59.041,24 59.041,58
GND on Top Layer "GND_L01_P000" (solid, remove dead copper, pour order 0): 0,58 0,0 65,0 65,24 59.041,24 59.041,58
GND on Int1 "GND_L02_P004" (solid, remove dead copper, pour order 4): 0,58 0,0 65,0 65,24 59.041,24 59.041,58
GND on Int2 "GND_L03_P005" (solid, remove dead copper, pour order 5): 0,58 0,0 65,0 65,24 59.041,24 59.041,58

## Keep-outs
Keep-Out Layer:
  circle w0.254: c17.475,29 r3.75
  circle w0.254: c47.5,29.025 r3.75
  lines w0.102: 0,7.25 3.5,7.25 cw(c3.5,3.5) 7.25,3.5 7.25,0 ; 0,50.75 3.5,50.75 ccw(c3.5,54.5) 7.25,54.5 7.25,58 ; 57.75,0 57.75,3.5 cw(c61.5,3.5) 61.5,7.25 65,7.25 ; 57.75,58 57.75,54.5 ccw(c61.5,54.5) 61.5,50.75 65,50.75

## Silkscreen, mask and mechanical layers (free items; w line width, h text height)
Top Overlay:
  circle w0.254: c17.475,29 r3.75
  circle w0.254: c47.5,29.025 r3.75
  lines w0.254: 0.252,5.375 cw(c3.5,3.5) 5.375,0.252 ; 0.252,52.625 ccw(c3.5,54.5) 5.375,57.748 ; 59.625,0.252 cw(c61.5,3.5) 64.748,5.375 ; 59.625,57.748 ccw(c61.5,54.5) 64.748,52.625
  text "VCC" at 1.545,28.284 h1.5
  text "EN" at 5.116,28.284 h1.5
  text "GND" at 1.476,26.284 h1.5
  text "TX" at 5.16,26.284 h1.5
  text "IO0" at 1.879,24.284 h1.5
  text "RX" at 5.142,24.284 h1.5
  text "Water Softener Salt Level Sensor V2" at 11.339,3.119 h2.75
Bottom Overlay:
  lines w0.254: 0.252,5.375 cw(c3.5,3.5) 5.375,0.252 ; 0.252,52.625 ccw(c3.5,54.5) 5.375,57.748 ; 59.625,0.252 cw(c61.5,3.5) 64.748,5.375 ; 59.625,57.748 ccw(c61.5,54.5) 64.748,52.625
  text "VCC" at 4.252,28.285 h1.5
  text "EN" at 6.765,28.295 h1.5
  text "GND" at 4.321,26.279 h1.5
  text "TX" at 6.726,26.279 h1.5
  text "IO0" at 3.918,24.298 h1.5
  text "RX" at 6.743,24.272 h1.5
  text "JLCJLCJLCJLC" at 43.761,13.792 h1.52
Board:
  the board outline again, w0.102

## Text inside footprints (layer, text, board x,y; h text height)
BATT: Bottom Overlay "N" at 30.825,52.533 h2; Bottom Overlay "P" at 17.98,52.554 h2